# Altium PCB 3DChameleonMK7_2024-11-28.pcbdoc
Units mil, origin at the board's own origin, x right, y up, seen from the top; angles counter-clockwise.
Board outline 3350.23 x 2945 mil, 2 copper layers (Top Layer, Bottom Layer); 23 components, 37 nets, 118 pads, 14 vias.
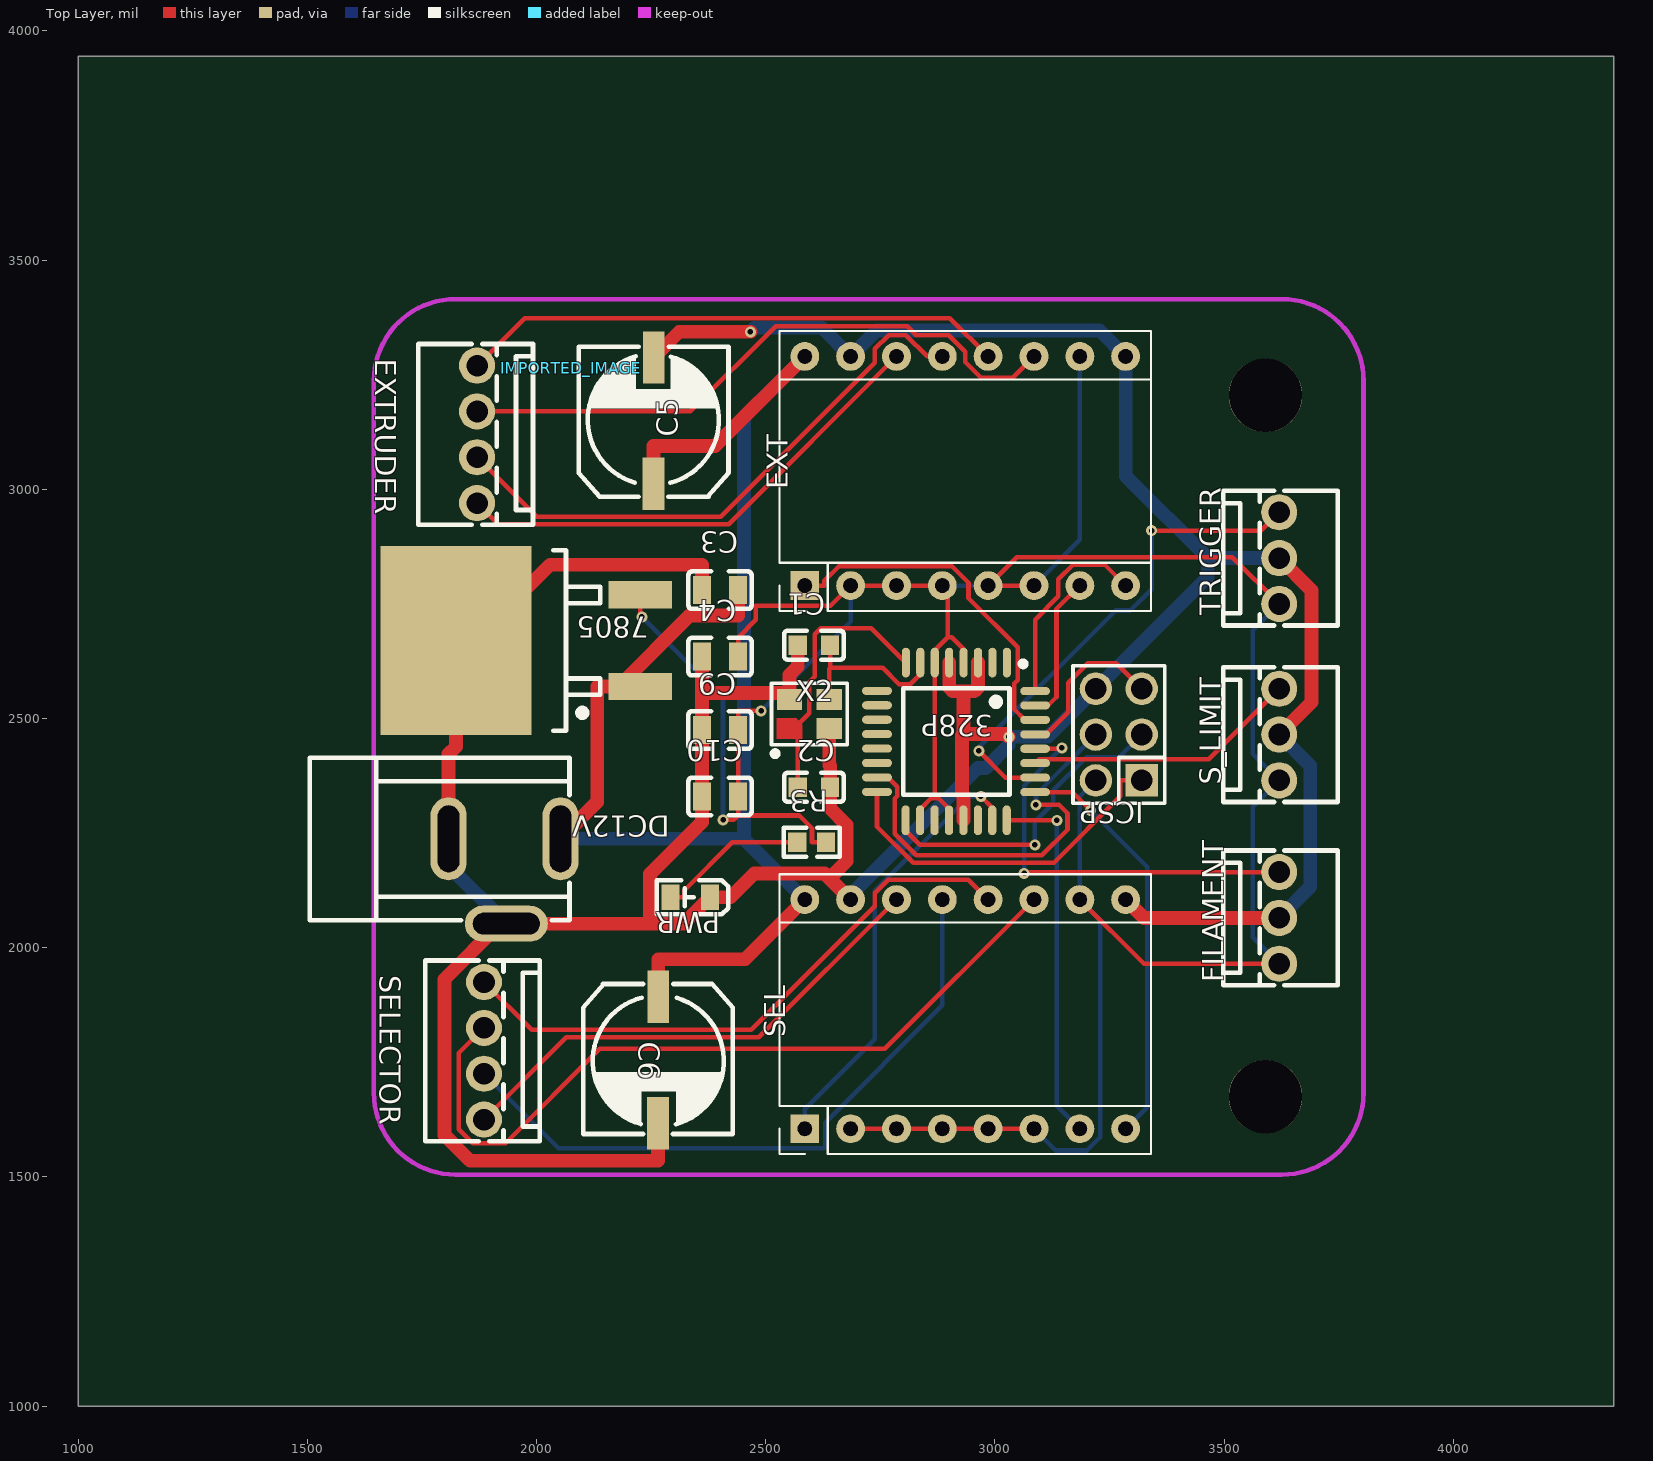
[diagram p0: Top Layer view]
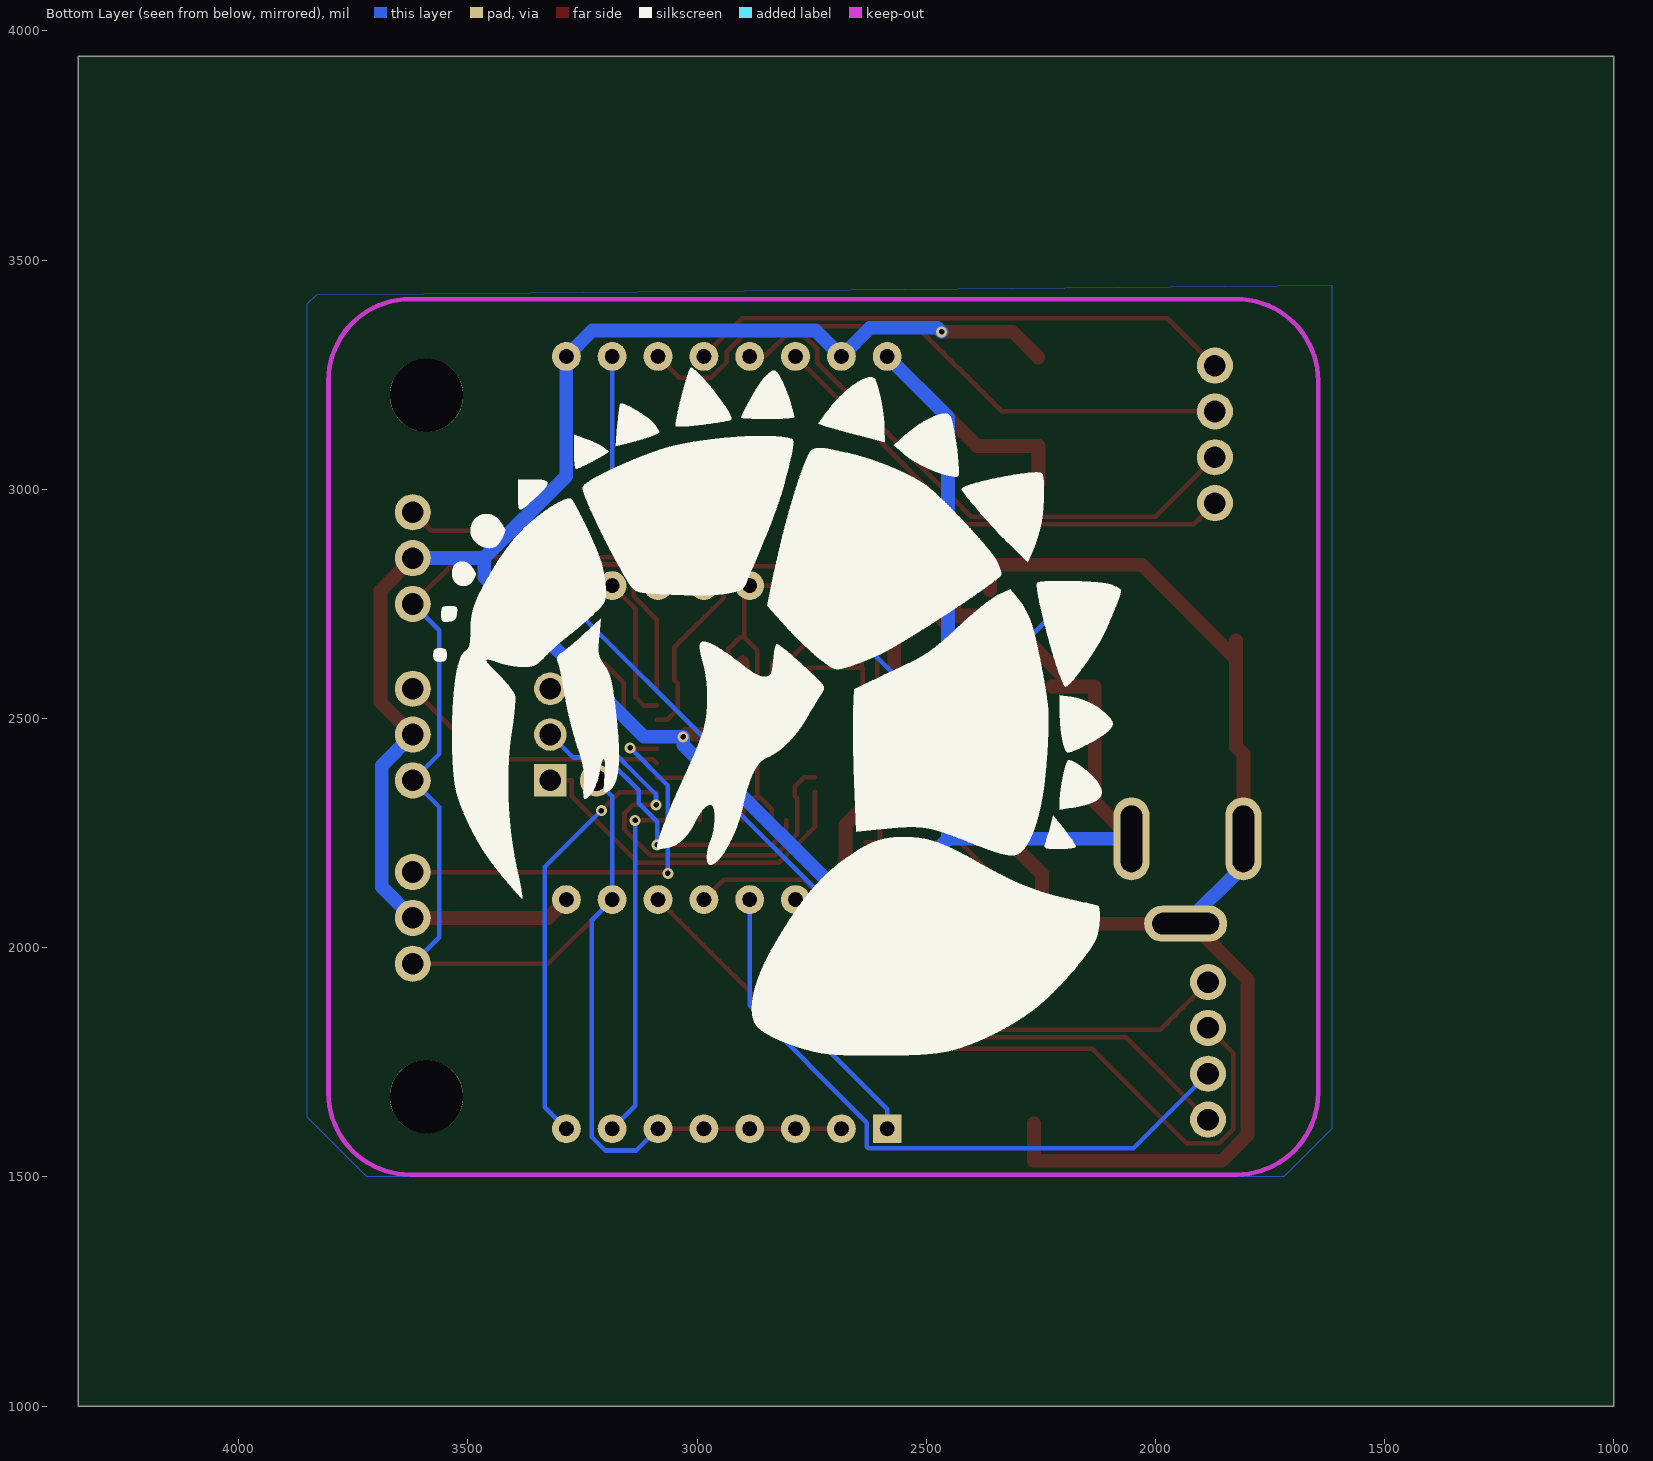
[diagram p1: Bottom Layer view, seen from below]

## Layer stack, top to bottom
Top Layer: signal copper (thickness not stored)
Dielectric: dielectric 12.6, FR-4, Dk 4.8
Bottom Layer: signal copper (thickness not stored)

## Board outline
4350.23,1000 1000,1000 1000,3945 4350.23,3945

## Components (designator, comment, footprint, x,y, rotation, side; value= is the part's Value field where it differs from the comment)
328P "ATMEGA328P-AU" TQFP-32_L7.0-W7.0-P0.80-LS9.0-BL 2915.23,2450 r180 top
7805 "CJ7805" TO-263-2_L10.1-W9.1-P5.08-LS15.2-TL 2025.19,2670.01 r180 top
C1 "18pF" C0603 2605.23,2660 r0 top
C2 "18pF" C0603 2605.23,2350 r0 top
C3 "22uF" C0805 2400.23,2780 r0 top
C4 "100nF" C0805 2400.23,2635 r0 top
C5 "100uF" CAP-SMD_BD8.0-L8.3-W8.3-FD 2255.23,3150 r90 top
C6 "100uF" CAP-SMD_BD8.0-L8.3-W8.3-FD 2265.23,1755 r270 top
C9 "10uF" C0805 2400.23,2475 r0 top
C10 "100nF" C0805 2400.23,2330 r0 top
DC12V "DC-005-25A" DC-IN-TH_DC005 1930.19,2144.97 r0 top
EXT "DRV8825" POLOLU_BREAKOUT-16_15.2X20.3MM 2585.23,2790 r90 top
EXTRUDER "22-23-2041" CONN-TH_4P-P2.54_22-23-2041 1870.23,3120 r270 top
FILAMENT "22-23-2031" CONN-TH_3P-P2.54_22-23-2031 3620.23,2065 r90 top
ICSP "ICSP" HDR-TH_6P-P2.54-V-R2-C3-S2.54 3270.23,2465 r90 top
IMPORTED_IMAGE "IMPORTED_IMAGE" IMPORTED_IMAGE 2075.23,3264.61 r0 top
PWR "0805G (Green)" LED0805-RD 2335.27,2110 r180 top
R3 "470" R0603 2600.23,2230 r0 top
S_LIMIT "22-23-2031" CONN-TH_3P-P2.54_22-23-2031 3620.23,2465 r90 top
SEL "DRV8825" POLOLU_BREAKOUT-16_15.2X20.3MM 2585.23,1605 r90 top
SELECTOR "22-23-2041" CONN-TH_4P-P2.54_22-23-2041 1885.23,1775 r270 top
TRIGGER "22-23-2031" CONN-TH_3P-P2.54_22-23-2031 3620.23,2850 r90 top
X2 "16MHz" OSC-SMD_4P-L3.2-W2.5-BL 2595.23,2510 r0 top

## Footprints (in the part's own frame and the unit in brackets; to place one, negate y for a bottom-side part, rotate by r counter-clockwise, add the part's x,y. Pads: shape width x height; smd on the part's side, far side on the other; paste and mask are expansions set on the pad)
C0603 [mm]
  rect 1x1.1 smd paste+0 mask+0.102: 1(-0.9,0) 2(0.9,0)
  silkscreen extent -1.65,-0.8 1.65,0.8
C0805 [mm]
  rect 1x1.55 smd paste+0 mask+0.102: 1(-1,0) 2(1,0)
  silkscreen extent -1.75,-1.04 1.75,1.04
CAP-SMD_BD8.0-L8.3-W8.3-FD [mm]
  rect 2.9x1.2 smd paste+0 mask+0.102: 1(-3.5,0.005) 2(3.5,-0.005)
  silkscreen extent -4.21,-4.16 4.1,4.15
CONN-TH_3P-P2.54_22-23-2031 [mm]
  round 2 hole 1.2 paste+0 mask+0.102: 1(-2.54,0) 2(0,0) 3(2.54,0)
  silkscreen extent -3.73,-3.25 3.73,3.1
CONN-TH_4P-P2.54_22-23-2041 [mm]
  round 2 hole 1.2 paste+0 mask+0.102: 1(-3.81,0) 2(-1.27,0) 3(1.27,0) 4(3.81,0)
  silkscreen extent -5,-3.25 5,3.1
DC-IN-TH_DC005 [mm]
  oval 2x4.6 hole 1.2 slot 3.7 at 90 deg paste+0 mask+0.102: 1(3.1,2.35) 2(-3.1,2.35)
  oval 4.6x2 hole 1.2 slot 3.7 at 0 deg paste+0 mask+0.102: 3(0.1,-2.35)
  silkscreen extent -10.8,-2.15 3.6,6.85
HDR-TH_6P-P2.54-V-R2-C3-S2.54 [mm]
  rect 1.8x1.8 hole 1.2 paste+0 mask+0.102: 1(-2.54,-1.27)
  round 1.8 hole 1.2 paste+0 mask+0.102: 2(-2.54,1.27) 3(0,-1.27) 4(0,1.27) 5(2.54,-1.27) 6(2.54,1.27)
  silkscreen extent -3.81,-2.54 3.81,2.54
IMPORTED_IMAGE [mil]
LED0805-RD [mm]
  rect 1x1.4 smd paste+0 mask+0.102: 1(-1.1,0) 2(1.1,0)
  silkscreen extent -2.1,-0.95 1.85,0.95
OSC-SMD_4P-L3.2-W2.5-BL [mm]
  rect 1.4x1.15 smd paste+0 mask+0.102: 2(1.1,-0.8) 3(1.1,0.8) 4(-1.1,0.8)
  Top Layer region: -1.8,-0.225 -0.762,-0.225 -0.4,-0.604 -0.4,-1.375 -1.8,-1.375
  silkscreen extent -2.1,-2.35 2.1,1.7
POLOLU_BREAKOUT-16_15.2X20.3MM [mm]
  rect 1.6x1.6 hole 0.8 slot 0.805 at 0 deg paste+0 mask+0.102: 1(0,0)
  round 1.6 hole 0.8 slot 0.805 at 0 deg paste+0 mask+0.102: 2(0,-2.54) 3(0,-5.08) 4(0,-7.62) 5(0,-10.16) 6(0,-12.7) 7(0,-15.24) 8(0,-17.78) 9(12.7,-17.78) 10(12.7,-15.24) 11(12.7,-12.7) 12(12.7,-10.16) 13(12.7,-7.62) 14(12.7,-5.08) 15(12.7,-2.54) 16(12.7,0)
  silkscreen extent -1.4,-19.18 14.1,1.4
R0603 [mm]
  rect 1x1.1 smd paste+0 mask+0.102: 1(-0.8,0) 2(0.8,0)
  silkscreen extent -1.55,-0.8 1.55,0.81
TO-263-2_L10.1-W9.1-P5.08-LS15.2-TL [mm]
  rect 3.504x1.5 smd paste+0 mask+0.102: 1(-5.106,2.54) 3(-5.106,-2.54)
  rect 8.38x10.49 smd paste+0 mask+0.102: 2(5.107,0)
  silkscreen extent -2.89,-5 -0.29,5
TQFP-32_L7.0-W7.0-P0.80-LS9.0-BL [mm]
  oval 0.45x1.65 smd paste+0 mask+0.102: 1(-2.817,-4.369) 2(-2.017,-4.369) 3(-1.217,-4.369) 4(-0.417,-4.369) 5(0.381,-4.369) 6(1.181,-4.369) 7(1.981,-4.369) 8(2.781,-4.369) 17(2.791,4.369) 18(1.991,4.369) 19(1.191,4.369) 20(0.391,4.369) 21(-0.406,4.369) 22(-1.207,4.369) 23(-2.007,4.369) 24(-2.807,4.369)
  oval 1.65x0.45 smd paste+0 mask+0.102: 9(4.381,-2.804) 10(4.381,-2.004) 11(4.381,-1.204) 12(4.381,-0.404) 13(4.381,0.394) 14(4.381,1.194) 15(4.381,1.994) 16(4.381,2.794) 25(-4.381,2.804) 26(-4.381,2.004) 27(-4.381,1.204) 28(-4.381,0.404) 29(-4.381,-0.394) 30(-4.381,-1.194) 31(-4.381,-1.994) 32(-4.381,-2.794)
  silkscreen extent -3.86,-4.45 2.94,2.95

## Free pads (board coordinates)
  round 160 hole 160 unplated paste+0: ""(3590.23,1675) ""(3590.23,3205)

## Via types
v1: diameter 24, hole 12, Top Layer to Bottom Layer, tented both sides, 14 vias

## Nets (pads, with @x,y where several pads share a name; then routed paths per layer and width w, separated by ;. In a path a pad name is that pad's centre, name@x,y a point inside that pad or via, vN(x,y) a via of type N, cw(c..) or ccw(c..) an arc to the next point about the centre after c; other vN are vias at no path point)
328P_1: 328P.1
328P_2: 328P.2
328P_7: 328P.7 C1.2 X2.3 | length 364.9
  Top Layer w10: X2.3 2638.53,2608.3 2640.63,2610.5 ; C1.2@2640.63,2660 2640.63,2627.3 2640.63,2610.5 ; 328P.7 2837.23,2597 2815.03,2574.8 2790.83,2574.8 2755.13,2610.5 2640.63,2610.5
328P_8: 328P.8 C2.1 | length 602.2
  Top Layer w10: C2.1 2569.83,2464.8 2554.63,2480 2562.93,2480 2594.73,2511.9 2594.73,2579.2 2607.23,2591.6 2607.23,2684.1 2620.43,2697.3 2730.43,2697.3 328P.8
328P_9: 328P.9
328P_10: 328P.10
328P_11: 328P.11
328P_12: 328P.12
328P_13: 328P.13
328P_14: 328P.14
328P_19: 328P.19
328P_22: 328P.22
328P_26: 328P.26 TRIGGER.3 | length 1097.6
  Top Layer w10: v1(2964.93,2429.3) 3023.13,2371.1 328P.26 ; v1(3341.83,2910) 3580.23,2910 TRIGGER.3
  Bottom Layer w10: v1(2964.93,2429.3) 2964.93,2437.1 3263.43,2735.6 3295.63,2735.6 3341.83,2781.8 v1(3341.83,2910)
328P_27: 328P.27 S_LIMIT.3 | length 599.8
  Top Layer w10: 328P.27 3096.63,2411.5 3466.73,2411.5 S_LIMIT.3
328P_28: 328P.28 FILAMENT.3 | length 924.4
  Top Layer w10: v1(3063.83,2162.1) 3066.73,2165 FILAMENT.3 ; 328P.28 3144.13,2434.1 v1(3145.93,2435.9)
  Bottom Layer w10: v1(3063.83,2162.1) 3063.83,2353.9 v1(3145.93,2435.9)
+5V: 328P.4 328P.6 328P.18 328P.20 7805.3 C4.2 C9.2 C10.2 EXT.2 EXT.3 EXT.4 EXT.5 EXT.6 EXT.10 FILAMENT.1 ICSP.2 R3.2 S_LIMIT.1 SEL.2 SEL.3 SEL.4 SEL.5 SEL.6 SEL.10 TRIGGER.1 | length 6914.7
  Top Layer w10: 7805.3 2226.23,2725.2 v1(2229.53,2721.8) ; v1(2406.83,2279) 2430.23,2279 2439.63,2288.4 ; C4.2 2439.63,2655.8 2439.63,2676.6 2478.23,2715.2 2478.23,2746 2641.23,2746 EXT.2 EXT.3 EXT.4 2896.93,2778.3 2896.93,2677 ; v1(2490.03,2516.6) 2439.63,2516.6 C9.2 C10.2 2439.63,2288.4 ; R3.2 2600.93,2230 2600.93,2260.8 2573.33,2288.4 2439.63,2288.4 ; SEL.2 SEL.3 SEL.4 SEL.5 SEL.6 ; 328P.18 2836.83,2302.3 2861.13,2326.6 2868.73,2326.6 ; 328P.20 2899.83,2303.3 2876.53,2326.6 2868.73,2326.6 ; 328P.4 2931.63,2651 2905.63,2677 2896.93,2677 ; EXT.6 EXT.5 3047.43,2852.2 3518.03,2852.2 TRIGGER.1 ; SEL.10 3325.23,1965 FILAMENT.1 ; 2868.73,2326.6 328P.6 2868.73,2648.8 2896.93,2677
  Bottom Layer w10: v1(2229.53,2721.8) 2406.83,2544.6 v1(2406.83,2279) ; v1(2490.03,2516.6) 2685.23,2711.8 EXT.2 ; EXT.4 EXT.5 ; SEL.6 3132.73,1557.5 3200.63,1557.5 3229.93,1586.9 3229.93,2060.3 SEL.10 3185.23,2330 ICSP.2 ; EXT.6 3185.23,2890 EXT.10 ; FILAMENT.1 3562.23,2023 3562.23,2307 S_LIMIT.1 3562.53,2422.7 3562.53,2692.3 TRIGGER.1
+12V: 7805.1 C3.2 C5.1 C6.1 DC12V.1 EXT.16 SEL.16 | length 3484
  Top Layer w30: DC12V.1 2132.23,2317.5 2132.23,2570 7805.1@2179.23,2570 ; 7805.1 7805.1@2179.23,2570 ; C5.1 2255.03,3094.3 2389.53,3094.3 EXT.16 ; C6.1 2265.43,1974.9 2455.13,1974.9 SEL.16 ; C3.2 2439.63,2724.5 2333.73,2724.5 7805.1@2179.23,2570
  Bottom Layer w30: DC12V.1 2452.73,2237.5 ; SEL.16 2452.73,2237.5 ; EXT.16 2452.73,3157.5 2452.73,2237.5
E_A1: EXT.12 EXTRUDER.1 | length 1192.6
  Top Layer w10: EXTRUDER.1 1973.93,3373.7 2901.53,3373.7 EXT.12
E_A2: EXT.11 EXTRUDER.2 | length 1371.2
  Top Layer w10: EXTRUDER.2 2335.53,3170 2521.63,3356.1 2809.13,3356.1 2828.63,3336.5 2899.03,3336.5 2935.23,3300.3 2935.23,3277.8 2969.73,3243.4 3038.63,3243.4 EXT.11
E_B1: EXT.13 EXTRUDER.3 | length 1270.2
  Top Layer w10: EXTRUDER.3 2000.13,2940.1 2402.23,2940.1 2738.03,3275.8 2738.03,3306.6 2768.03,3336.5 2805.83,3336.5 2852.43,3290 EXT.13
E_B2: EXT.14 EXTRUDER.4 | length 1085.8
  Top Layer w10: EXTRUDER.4 1916.33,2923.9 2419.23,2923.9 EXT.14
E_DIR: 328P.32 EXT.8 | length 444.2
  Top Layer w10: 328P.32 3087.73,2715.7 3138.53,2766.4 3138.53,2804 3170.53,2836.1 3239.13,2836.1 EXT.8
E_ENABLE: 328P.30 EXT.1 | length 774.7
  Top Layer w10: EXT.1 2627.83,2790 2627.83,2800.7 2659.73,2832.6 2906.43,2832.6 2942.43,2796.6 2942.43,2762.7 3049.43,2655.7 3049.43,2583.3 3042.63,2576.6 3042.63,2519.6 3065.23,2497 328P.30
E_STEP: 328P.31 EXT.7 | length 318.4
  Top Layer w10: 328P.31 3115.93,2528.5 3134.33,2546.9 3134.33,2739.1 EXT.7
GND: 328P.3 328P.5 328P.21 7805.2 C1.1 C2.2 C3.1 C4.1 C5.2 C6.2 C9.1 C10.1 DC12V.2 DC12V.3 EXT.9 EXT.15 FILAMENT.2 ICSP.6 PWR.1 S_LIMIT.2 SEL.9 SEL.15 TRIGGER.2 X2.2 X2.4 | length 9318.2
  Top Layer w30: DC12V.2@1808.13,2237.5 1808.13,2422.5 1824.13,2438.5 7805.2@1824.13,2630 ; 7805.2 7805.2@1824.13,2630 ; C5.2 2311.33,3343.7 v1(2466.73,3343.7) ; C6.2 2265.03,1535.1 1855.13,1535.1 1799.13,1591.1 1799.13,1931.2 1920.43,2052.4 DC12V.3 2247.23,2052.4 ; C4.1@2360.83,2635 2360.83,2555.5 ; C3.1@2360.83,2780 2360.83,2835.5 2029.63,2835.5 7805.2@1824.13,2630 ; X2.4 X2.4@2551.93,2555.5 ; C1.1 2569.83,2613.3 2551.93,2595.5 X2.4@2551.93,2555.5 ; X2.2 2638.53,2398.8 2640.63,2396.7 2640.63,2350 2640.63,2303.3 2676.43,2267.6 2676.43,2188.5 2639.13,2151.1 ; SEL.15 2639.13,2151.1 ; 328P.5 2900.23,2567.2 2908.13,2559.4 2931.23,2559.4 ; 328P.21 2931.23,2332.8 2927.93,2336.1 2927.93,2463 2931.23,2466.3 ; 328P.3 2963.13,2567.3 2955.13,2559.4 2931.23,2559.4 ; v1(3030.23,2460) 3023.93,2466.3 2931.23,2466.3 ; SEL.9 3325.23,2065 FILAMENT.2 ; S_LIMIT.2 3690.83,2535.6 3690.83,2779.4 TRIGGER.2 ; 2247.23,2052.4 2247.23,2160.9 2360.83,2274.5 2360.83,2330 2360.83,2475 2360.83,2555.5 ; 2247.23,2052.4 2321.03,2052.4 PWR.1 2423.23,2110 2475.03,2161.7 2628.53,2161.7 2639.13,2151.1 ; 2360.83,2555.5 X2.4@2551.93,2555.5 ; 2931.23,2466.3 2931.23,2559.4
  Bottom Layer w30: DC12V.2@1808.13,2237.5 1808.13,2178.4 DC12V.3 ; v1(2466.73,3343.7) 2475.63,3352.6 2622.63,3352.6 EXT.15 2741.73,3346.5 3228.73,3346.5 EXT.9 3285.23,3029.3 3464.53,2850 ; SEL.15 2685.23,2115 2962.53,2392.3 2980.23,2392.3 3030.23,2442.3 v1(3030.23,2460) 3115.23,2460 ICSP.6 3464.53,2809.3 3464.53,2850 ; FILAMENT.2 3687.73,2132.4 3687.73,2397.5 S_LIMIT.2 ; TRIGGER.2 3464.53,2850
MISO: 328P.16 ICSP.1 | length 780.9
  Top Layer w10: 328P.16 2742.73,2264.3 2821.73,2185.2 3128.83,2185.2 3273.73,2330.1 3273.73,2365 ICSP.1
MOSI: 328P.15 ICSP.4 | length 896.5
  Top Layer w10: 328P.15 2766.43,2371.5 2786.73,2351.2 2786.73,2331 2781.23,2325.5 2781.23,2248.6 2828.43,2201.4 3102.03,2201.4 3158.33,2257.7 3158.33,2293 3139.83,2311.6 v1(3089.63,2311.6)
  Bottom Layer w10: v1(3089.63,2311.6) 3089.63,2334.3 ICSP.4
R3_1: PWR.2 R3.1 | length 335.5
  Top Layer w10: PWR.2@2291.93,2110 2322.73,2110 2322.73,2125.4 2427.33,2230 R3.1
RESET: 328P.29 ICSP.5 | length 357.6
  Top Layer w10: 328P.29 3112.33,2465.5 3160.33,2513.5 3160.33,2578.2 3202.73,2620.5 3264.73,2620.5 ICSP.5
S_A1: SEL.12 SELECTOR.1 | length 1313.4
  Top Layer w10: SELECTOR.1 1989.53,1820.7 2468.43,1820.7 2738.03,2090.2 2738.03,2119 2767.13,2148 2942.23,2148 SEL.12
S_A2: SEL.11 SELECTOR.2 | length 1731.5
  Top Layer w10: SELECTOR.2 1830.43,1770.2 1830.43,1603.6 1860.43,1573.6 1932.33,1573.6 2137.83,1779.2 2759.43,1779.2 SEL.11
S_B1: SEL.13 SELECTOR.3 | length 1458.5
  Bottom Layer w10: SELECTOR.3 2047.83,1562.4 2626.63,1562.4 2629.53,1565.3 2629.53,1618.4 2885.23,1874.1 SEL.13
S_B2: SEL.14 SELECTOR.4 | length 1098.8
  Top Layer w10: SELECTOR.4 2064.83,1804.5 2484.83,1804.5 SEL.14
S_DIR: 328P.25 SEL.8 | length 902.5
  Top Layer w10: 328P.25 3168.53,2339.6 v1(3208.83,2299.3)
  Bottom Layer w10: v1(3208.83,2299.3) 3332.03,2176.1 3332.03,1651.8 SEL.8
S_ENABLE: 328P.23 SEL.1 | length 961.3
  Top Layer w10: v1(2969.53,2329.9) 2994.23,2305.2 328P.23
  Bottom Layer w10: SEL.1 2585.23,1647.6 2738.03,1800.4 2738.03,2124.1 2943.73,2329.9 v1(2969.53,2329.9)
S_STEP: 328P.24 SEL.7 | length 803.2
  Top Layer w10: 328P.24 v1(3135.23,2278)
  Bottom Layer w10: v1(3135.23,2278) 3135.23,1655 SEL.7
SCK: 328P.17 ICSP.3 | length 696.2
  Top Layer w10: 328P.17 2805.33,2254.9 2835.73,2224.5 v1(3086.93,2224.5)
  Bottom Layer w10: v1(3086.93,2224.5) 3086.93,2274.6 3127.63,2315.3 3127.63,2343.7 3198.93,2415 3270.23,2415 ICSP.3

## Polygon pours and split planes (outlines as drawn)
GND on Bottom Layer (solid): 1615.23,3445 1615.23,1605 1720.23,1500 3720.23,1500 3850.23,1630 3850.23,3405 3830.23,3425

## Keep-outs
Keep-Out Layer:
  lines w10: 1645.23,1683 ccw(c1823.23,1683) 1823.23,1505 ; 1645.23,3237 cw(c1823.23,3237) 1823.23,3415 ; 3626.23,1505 ccw(c3626.23,1683) 3804.23,1683 ; 3626.23,3415 cw(c3626.23,3237) 3804.23,3237

## Text inside footprints (layer, text, board x,y; h text height)
EXT: Document "REF" at 2604.92,2992.76 h39.37 r90
SEL: Document "REF" at 2604.92,1807.76 h39.37 r90